# Altium PCB PCB1.PcbDoc
Units mil, origin at the board's own origin, x right, y up, seen from the top; angles counter-clockwise.
Board outline 3937 x 1968.5 mil, 2 copper layers (Top Layer, Bottom Layer); 57 components, 43 nets, 144 pads, 0 vias.
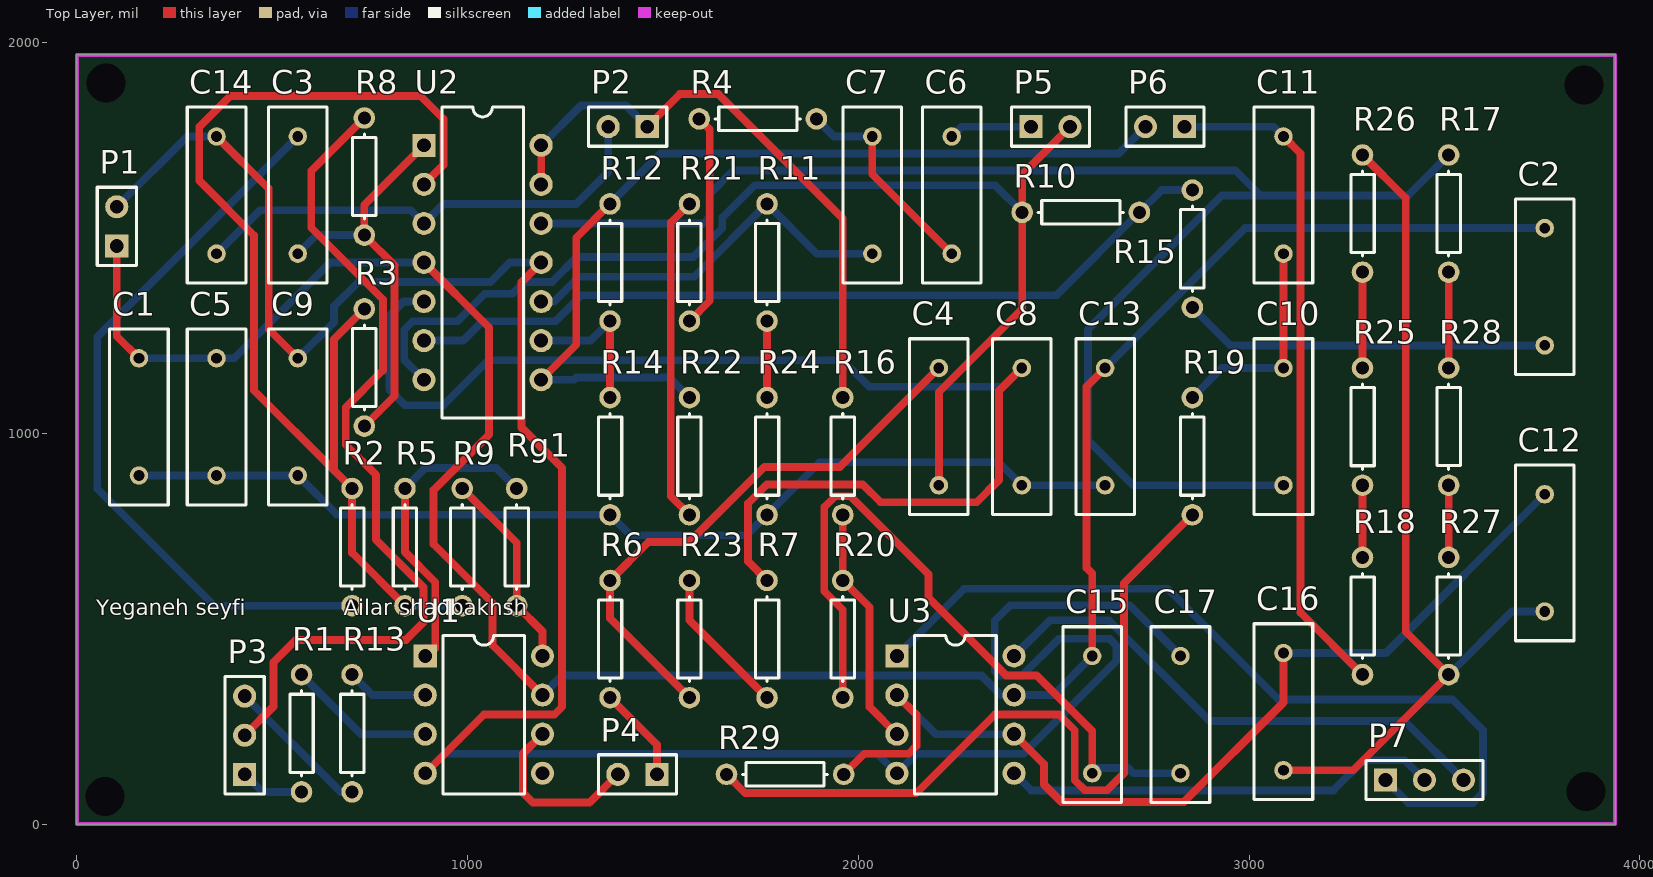
[diagram p0: Top Layer view]
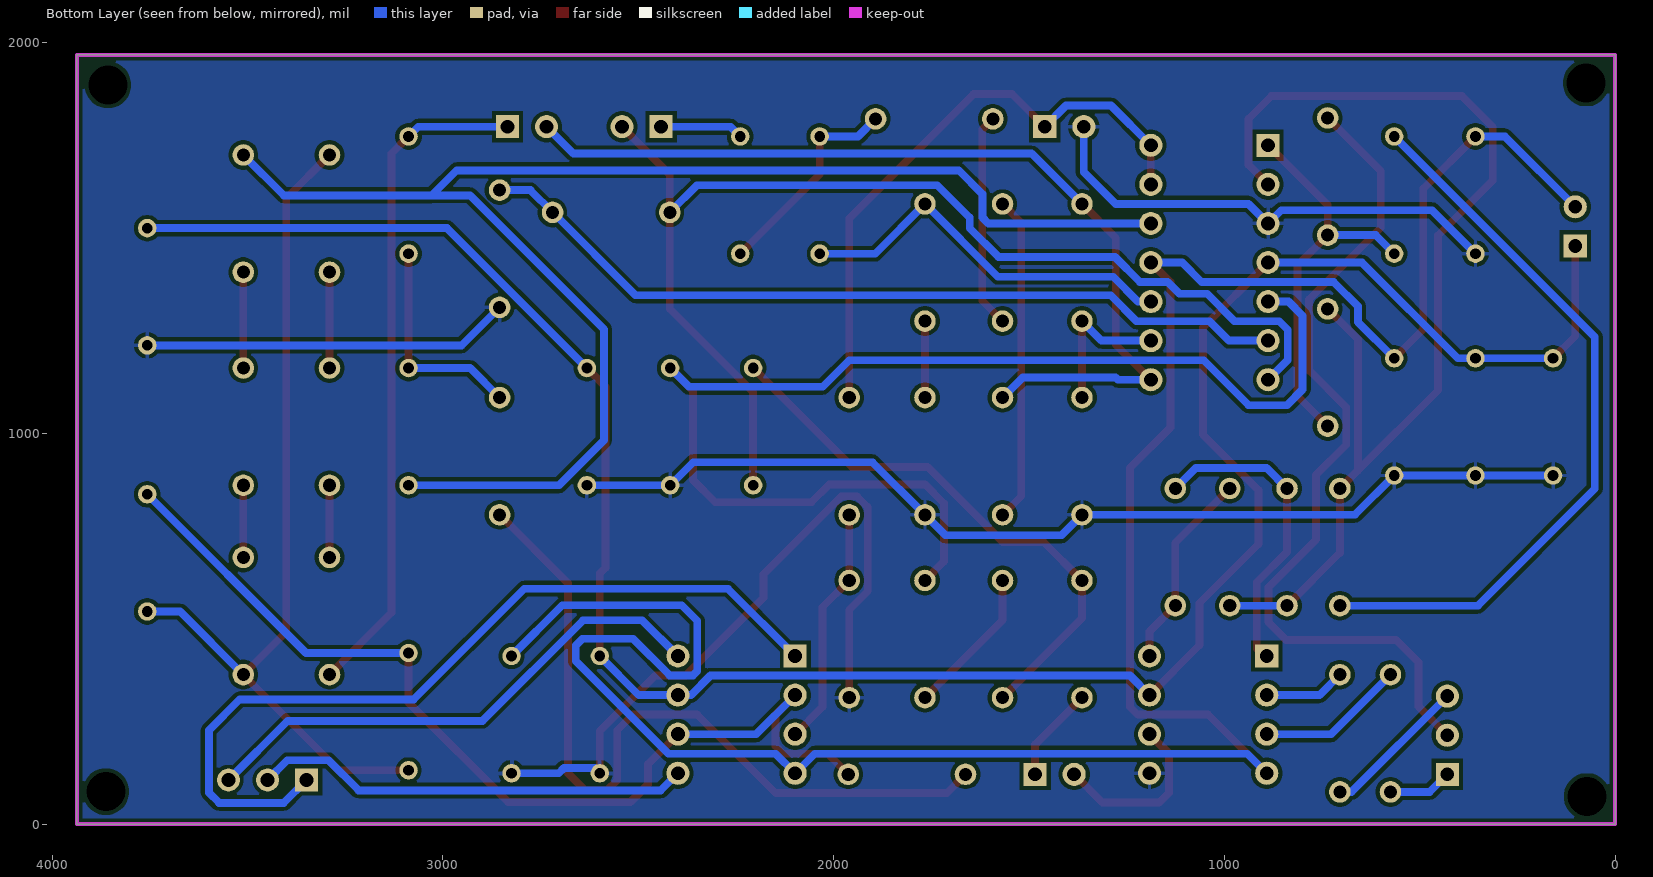
[diagram p1: Bottom Layer view, seen from below]

## Layer stack, top to bottom
Top Solder: solder mask 0.4, Solder Resist, Dk 3.5
Top Layer: signal copper 1.4
Dielectric 1: dielectric 12.6, FR-4, Dk 4.8
Bottom Layer: signal copper 1.4
Bottom Solder: solder mask 0.4, Solder Resist, Dk 3.5

## Board outline
0,0 3937,0 3937,1968.5 0,1968.5

## Design rules (kind name [scope] priority, off if disabled: settings)
BoardOutlineClearance [All] p1: gap=10 ignorepadtopadclearanceinfootprint=FALSE except(0: Arc-SplitContinuation Track-SplitContinuation SMDPad-SplitContinuation THPad-SplitContinuation Via-SplitContinuation Fill-SplitContinuation Poly-SplitContinuation Region-SplitContinuation Text-SplitContinuation)
Clearance [All] p1: gap=10 ignorepadtopadclearanceinfootprint=FALSE except(0: Arc-Hole Track-Hole SMDPad-Hole THPad-Hole Via-Hole Fill-Hole Poly-Hole Region-Hole Text-Hole)
PolygonConnect [All] p1: connectstyle=Relief reliefconductorwidth=10 reliefentries=4 polygonreliefangle="90 Angle" airgapwidth=10
RoutingVias [All] p1: holewidth=28 width=50 viastyle="Through Hole" minholewidth=28 minwidth=50 maxholewidth=28 maxwidth=50
SolderMaskExpansion [All] p1: expansion=4 istentingtop=FALSE
Width [All] p1: maxlimit=100 minlimit=10 preferedwidth=20
30 further rules are at their usual default settings.

## Components (designator, comment, footprint, x,y, rotation, side; value= is the part's Value field where it differs from the comment)
C1 "100nF" RAD-0.3 158.85,1041.96 r90 top
C2 "10uF" RAD-0.3 3756.96,1375.06 r90 top
C3 "100nF" RAD-0.3 565.47,1609.75 r90 top
C4 "Cap" RAD-0.3 2206.13,1017.02 r90 top value=10nF
C5 "Cap" RAD-0.3 357.43,1041.96 r90 top value=100nF
C6 "Cap" RAD-0.3 2239.23,1609.75 r90 top value=10u
C7 "Cap" RAD-0.3 2035.92,1609.75 r90 top value=10u
C8 "Cap" RAD-0.3 2418.54,1017.02 r90 top value=100nF
C9 "Cap" RAD-0.3 565.47,1041.96 r90 top value=100nF
C10 "Cap" RAD-0.3 3088.07,1017.02 r90 top value=10nF
C11 "Cap" RAD-0.3 3088.07,1609.75 r90 top value=10nF
C12 "Cap" RAD-0.3 3756.96,693.94 r90 top value=10nF
C13 "100nF" RAD-0.3 2631.67,1017.02 r90 top
C14 "Cap" RAD-0.3 357.43,1609.75 r90 top value=100nF
C15 "Cap" RAD-0.3 2598.57,279.94 r90 top value=100nF
C16 "Cap" RAD-0.3 3088.07,287.62 r90 top value=10nF
C17 "Cap" RAD-0.3 2824.51,279.94 r90 top value=100nF
P1 "Header 2" HDR1X2 102.11,1479.67 r90 top
P2 "Header 2" HDR1X2 1459.8,1784.75 r180 top
P3 "Header 3" HDR1X3 429.47,127.18 r90 top
P4 "Header 2" HDR1X2 1484.53,127.18 r180 top
P5 "Header 2" HDR1X2 2441.83,1784.75 r0 top
P6 "Header 2" HDR1X2 2834.98,1784.75 r180 top
P7 "Header 3" HDR1X3 3348.92,112.62 r0 top
R1 "Res1" AXIAL-0.3 574.93,232.15 r90 top value=220k
R2 "Res1" AXIAL-0.3 704.47,708.75 r90 top value=10k
R3 "Res1" AXIAL-0.3 735.68,1168.32 r90 top value=1meg
R4 "Res1" AXIAL-0.3 1742.78,1804.75 r180 top value=560k
R5 "Res1" AXIAL-0.3 839.7,708.75 r90 top value=22k
R6 "Res1" AXIAL-0.3 1364.53,473.29 r90 top value=82K
R7 "Res1" AXIAL-0.3 1766.42,473.29 r90 top value=8.2k
R8 "Res1" AXIAL-0.3 735.68,1657.13 r90 top value=220k
R9 "Res1" AXIAL-0.3 986.28,708.75 r90 top value=22k
R10 "Res1" AXIAL-0.3 2569.45,1565.5 r180 top value=100k
R11 "Res1" AXIAL-0.3 1766.42,1437.11 r90 top value=33k
R12 "Res1" AXIAL-0.3 1364.53,1437.11 r90 top value=100k
R13 "Res1" AXIAL-0.3 704.47,232.15 r90 top value=220k
R14 "Res1" AXIAL-0.3 1364.53,941.37 r90 top value=10k
R15 "Res1" AXIAL-0.3 2854.98,1472.33 r90 top value=10k
R16 "Res1" AXIAL-0.3 1960.27,941.37 r90 top value=100
R17 "Res1" AXIAL-0.3 3511.1,1562.37 r90 top value=18K
R18 "Res1" AXIAL-0.3 3290.48,532.3 r90 top value=150K
R19 "Res1" AXIAL-0.3 2854.98,941.37 r90 top value=39k
R20 "Res1" AXIAL-0.3 1960.27,473.29 r90 top value=1k
R21 "Res1" AXIAL-0.3 1567.84,1437.11 r90 top value=39k
R22 "Res1" AXIAL-0.3 1567.84,941.37 r90 top value=1k
R23 "Res1" AXIAL-0.3 1567.84,473.29 r90 top value=10k
R24 "Res1" AXIAL-0.3 1766.42,941.37 r90 top value=56k
R25 "Res1" AXIAL-0.3 3290.48,1017.02 r90 top value=150K
R26 "Res1" AXIAL-0.3 3290.48,1562.37 r90 top value=18K
R27 "Res1" AXIAL-0.3 3511.1,532.31 r90 top value=150K
R28 "Res1" AXIAL-0.3 3511.1,1017.02 r90 top value=150K
R29 "Res1" AXIAL-0.3 1812.65,127.18 r180 top value=120k
Rg1 "Res1" AXIAL-0.3 1125.57,708.75 r90 top value=15k
U1 "AD620AN" N-8 1041.66,279.94 r270 top
U2 "TL084J" J014 1038.29,1437.11 r270 top
U3 "TL081JG" JG008 2248.69,279.94 r270 top

## Footprints (in the part's own frame and the unit in brackets; to place one, negate y for a bottom-side part, rotate by r counter-clockwise, add the part's x,y. Pads: shape width x height; smd on the part's side, far side on the other; paste and mask are expansions set on the pad)
AXIAL-0.3 [mm] "Axial Device, Thru-Hole; 2 Leads; 0.3 in Pin Spacing"
  round 1.4 hole 0.85: 1(-3.81,0) 2(3.81,0)
  silkscreen extent -2.77,-0.76 2.77,0.76
HDR1X2 [mm] "Connector; Header; 2 Position"
  rect 1.5x1.5 hole 0.9: 1(0,0)
  round 1.5 hole 0.9: 2(2.54,0)
  silkscreen extent -1.27,-1.27 3.81,1.27
HDR1X3 [mm] "Connector; Header; 3 Position"
  rect 1.5x1.5 hole 0.9: 1(0,0)
  round 1.5 hole 0.9: 2(2.54,0) 3(5.08,0)
  silkscreen extent -1.27,-1.27 6.35,1.27
J014 [mm] "DIP; 14 Leads; Row Spacing 7.62 mm; Pitch 2.54 mm"
  rect 1.5x1.5 hole 0.9: 1(-7.62,-3.81)
  round 1.5 hole 0.9: 2(-5.08,-3.81) 3(-2.54,-3.81) 4(0,-3.81) 5(2.54,-3.81) 6(5.08,-3.81) 7(7.62,-3.81) 8(7.62,3.81) 9(5.08,3.81) 10(2.54,3.81) 11(0,3.81) 12(-2.54,3.81) 13(-5.08,3.81) 14(-7.62,3.81)
  silkscreen extent -10.1,-2.65 10.1,2.65
JG008 [mm] "DIP; 8 Leads; Row Spacing 7.62 mm; Pitch 2.54 mm"
  rect 1.5x1.5 hole 0.9: 1(-3.81,-3.81)
  round 1.5 hole 0.9: 2(-1.27,-3.81) 3(1.27,-3.81) 4(3.81,-3.81) 5(3.81,3.81) 6(1.27,3.81) 7(-1.27,3.81) 8(-3.81,3.81)
  silkscreen extent -5.15,-2.65 5.15,2.65
N-8 [mm] "DIP; 8 Leads; Row Spacing 7.62 mm; Pitch 2.54 mm"
  rect 1.5x1.5 hole 0.9: 1(-3.81,-3.81)
  round 1.5 hole 0.9: 2(-1.27,-3.81) 3(1.27,-3.81) 4(3.81,-3.81) 5(3.81,3.81) 6(1.27,3.81) 7(-1.27,3.81) 8(-3.81,3.81)
  silkscreen extent -5.15,-2.65 5.15,2.65
RAD-0.3 [mm] "Radial Cap, Thru-Hole; 2 Leads; 0.3 in Pin Spacing"
  round 1.2 hole 0.7: 1(-3.81,0) 2(3.81,0)
  silkscreen extent -5.72,-1.9 5.71,1.91

## Part data
C1 C2 C3 C13: library part Cap, "Capacitor", LatestRevisionDate=17-Jul-2002, LatestRevisionNote="Re-released for DXP Platform.", PackageDescription="Radial Cap, Thru-Hole; 2 Leads; 0.3 in Pin Spacing", PackageReference=RAD-0.3, Published=8-Jun-2000, Publisher="Altium Limited"
C4 C5 C6 C7 C8 C9 C10 C11 C12 C14 C15 C16 C17: "Capacitor", LatestRevisionDate=17-Jul-2002, LatestRevisionNote="Re-released for DXP Platform.", PackageDescription="Radial Cap, Thru-Hole; 2 Leads; 0.3 in Pin Spacing", PackageReference=RAD-0.3, Published=8-Jun-2000, Publisher="Altium Limited"
P1 P2 P4 P5 P6: "Header, 2-Pin", LatestRevisionDate=17-Jul-2002, LatestRevisionNote="Re-released for DXP Platform.", Publisher="Altium Limited"
P3 P7: "Header, 3-Pin", LatestRevisionDate=17-Jul-2002, LatestRevisionNote="Re-released for DXP Platform.", Publisher="Altium Limited"
R1 R2 R3 R4 R5 R6 R7 R8 R9 R10 R11 R12 R13 R14 R15 R16 R17 R18 R19 R20 R21 R22 R23 R24 R25 R26 R27 R28 R29 Rg1: "Resistor", LatestRevisionDate=17-Jul-2002, LatestRevisionNote="Re-released for DXP Platform.", PackageDescription="Axial Device, Thru-Hole; 2 Leads; 0.3 in Pin Spacing", PackageReference=AXIAL-0.3, Published=8-Jun-2000, Publisher="Altium Limited"
U1: "Low-Cost, Low-Power Instrumentation Amplifier", ComponentLink1Description="Manufacturer Link", ComponentLink1URL=http://www.analog.com/en/prod/0%2C2877%2CAD620%2C00.html, ComponentLink2Description=Datasheet, ComponentLink2URL=http://www.analog.com/UploadedFiles/Data_Sheets/897653854AD620_g.pdf, DatasheetVersion="REV.D 1998", LatestRevisionDate=04-Mar-2005, LatestRevisionNote="Stylized 3D Model Added.", PackageDescription="DIP; 8 Leads; Row Spacing 7.62 mm; Pitch 2.54 mm", PackageReference=N-8, PackageVersion=revA, Published=8-Jun-2000, Publisher="Altium Limited"
U2 U3: "JFET-Input Operational Amplifier", ComponentLink1Description="Manufacturer Link", ComponentLink1URL=http://www.ti.com/, ComponentLink2Description=Datasheet, DatasheetVersion=Feb-1999, LatestRevisionDate=04-Mar-2005, LatestRevisionNote="Stylized 3D Model Added.", Published=16-Jan-2001, Publisher="Altium Limited"
  U2: ComponentLink2URL=http://www-s.ti.com/sc/ds/tl084.pdf, PackageDescription="DIP; 14 Leads; Row Spacing 7.62 mm; Pitch 2.54 mm", PackageReference=J014, PackageVersion=Jun-1999
  U3: ComponentLink2URL=http://www-s.ti.com/sc/ds/tl081.pdf, Note="Pin 8 is not connected", PackageDescription="DIP; 8 Leads; Row Spacing 7.62 mm; Pitch 2.54 mm", PackageReference=JG008, PackageVersion=Jan-1995

## Free pads (board coordinates)
  round 60 hole 100: 1(71.91,70.44) 1(74.07,1896.59) 1(3857.57,1891.58) 1(3862.97,82.79)

## Nets (pads, with @x,y where several pads share a name; then routed paths per layer and width w, separated by ;. In a path a pad name is that pad's centre, name@x,y a point inside that pad or via, vN(x,y) a via of type N, cw(c..) or ccw(c..) an arc to the next point about the centre after c; other vN are vias at no path point)
GND: C1.1 C2.1 C5.1 C8.1 C9.1 C13.1 C14.1 C15.1 C17.1 P2.2 R14.1 R15.1 R20.1 R24.1 U1.5 U2.3 | length 6647.5
  Top Layer w20: R20.1 1960.27,548.15 1912.71,595.71 1912.71,811.07 1940.57,838.93 1979.97,838.93 2179.54,639.36 2179.54,579.04 2378.17,380.41 2456.02,380.41 2598.57,237.86 C15.1
  Bottom Layer w20: C1.1 C5.1 C9.1 666.06,791.37 R14.1 1416.9,739 1714.04,739 R24.1 1901.04,926 2359.56,926 C8.1 C13.1 ; C14.1 468.69,1571 854.4,1571 U2.3 938.18,1587 1278,1587 1359.8,1668.8 P2.2 ; C15.1 2612.04,143.41 2690.28,143.41 2703.76,129.94 C17.1 ; R15.1 2952.25,1225.06 C2.1
IN+: R1.2 U1.3 | length 379.8
  Bottom Layer w20: R1.2 727.14,229.94 U1.3
IN-: R13.2 U1.2 | length 208.8
  Bottom Layer w20: R13.2 756.68,329.94 U1.2
LA: P3.1 R1.1 | length 164.1
  Bottom Layer w20: P3.1 474.5,82.15 R1.1
NC: P7.3 U3.8 | length 1357.7
  Bottom Layer w20: U3.8 2490.44,521.69 2641.31,521.69 2899,264 3397.54,264 P7.3
NetC3_1: C3.1 R3.1 R8.1 U2.1 | length 1036.1
  Top Layer w20: R3.1 813.25,1095.88 813.25,1429.57 R8.1 735.69,1584.51 U2.1
  Bottom Layer w20: C3.1 612.85,1507.13 R8.1
NetC3_2: C3.2 R2.1 | length 1890.9
  Bottom Layer w20: C3.2 52,1246.28 52,858 351.25,558.75 R2.1
NetC4_1: C4.1 P5.2 R10.2 U2.7 | length 2984.7
  Top Layer w20: C4.1 2206.14,1105.14 2419.45,1318.45 R10.2 2419.45,1662.37 P5.2
  Bottom Layer w20: U2.7 838,1187.4 838,1265 860,1287 974,1287 1044,1357 1115,1357 1145.58,1387.58 1216.58,1387.58 1280,1451 1577.89,1451 1652,1525.11 1652,1551.91 1735.09,1635 2349.96,1635 R10.2
NetC4_2: C4.2 R6.2 R23.1 | length 1451
  Top Layer w20: R23.1 1364.53,526.6 R6.2 1463.24,722 1568,722 1760,914 1953.11,914 C4.2
NetC6_1: C6.1 C7.2 R4.1 | length 546
  Top Layer w20: C7.2 2035.92,1663.06 C6.1
  Bottom Layer w20: R4.1 1937.78,1759.75 C7.2
NetC6_2: C6.2 P5.1 | length 213
  Bottom Layer w20: C6.2 2264.23,1784.75 P5.1
NetC7_1: C7.1 R11.2 U2.10 | length 1003.9
  Bottom Layer w20: U2.10 1221.47,1337.11 1284.78,1400.42 1579.73,1400.42 R11.2 1893.78,1459.75 C7.1
NetC8_2: C8.2 R7.2 U2.5 | length 3255.9
  Top Layer w20: R7.2 1718,671.71 1718,821 1765.93,868.93 2011.58,868.93 2057.11,823.4 2302.76,823.4 2360,880.65 2360,1108.49 C8.2
  Bottom Layer w20: U2.5 836.11,1337.11 800,1301 800,1112 840,1072 938,1072 1053,1187 1960,1187 2028,1119 2370.51,1119 C8.2
NetC10_1: C10.1 R17.2 U2.12 | length 3898.3
  Bottom Layer w20: U2.12 1604.11,1537.11 1619.16,1552.16 1619.16,1612.16 1680,1673 2965,1673 3029,1609 ; C10.1 2702.98,867.02 2588,982 2588,1266 2931,1609 3029,1609 ; R17.2 3407.73,1609 3029,1609
NetC10_2: C10.2 C11.1 R19.2 | length 557.2
  Top Layer w20: C10.2 C11.1
  Bottom Layer w20: R19.2 2930.63,1167.02 C10.2
NetC11_2: C11.2 P6.1 R18.1 | length 1724.7
  Top Layer w20: C11.2 3132,1715.81 3132,540.78 R18.1
  Bottom Layer w20: P6.1 3063.07,1784.75 C11.2
NetC12_1: C12.1 C16.1 R26.2 R27.1 | length 2258.6
  Top Layer w20: C16.1 3266.41,137.62 R27.1 3401,492.4 3401,1601.85 R26.2
  Bottom Layer w20: R27.1 3672.73,543.94 C12.1
NetC12_2: C12.2 C16.2 R29.1 U3.2 U3.6 | length 2569.9
  Top Layer w20: R29.1 2015.47,180 2129,180 2149,200 2149,279.63 U3.2 ; U3.6 2475.39,153.23 2475.39,100.92 2520,56.32 2833.32,56.32 3088.07,311.07 C16.2
  Bottom Layer w20: U3.2 2198.69,229.94 U3.6 ; C16.2 3350.64,437.62 C12.2
NetP4_1: P4.1 R6.1 | length 245.8
  Top Layer w20: R6.1 1484.53,203.29 P4.1
NetP4_2: P4.2 U1.6 | length 453.3
  Top Layer w20: U1.6 1142,180.28 1142,80 1167,55 1312.35,55 P4.2
NetR2_2: R2.2 R3.2 R5.1 R9.1 U2.2 | length 2905.6
  Top Layer w20: R3.2 658.13,1240.76 658.13,905.09 ; R5.1 704.47,693.98 R2.2 658.13,905.09 ; U2.2 938,1686.82 938,1805 880,1863 392,1863 313,1784 313,1647 453,1507 453,1110.21 658.13,905.09
  Bottom Layer w20: R5.1 R9.1
NetR4_2: R4.2 R21.1 | length 550.5
  Top Layer w20: R21.1 1620,1339.27 1620,1777.53 R4.2
NetR7_1: R7.1 R23.2 | length 382.3
  Top Layer w20: R23.2 1567.84,521.87 R7.1
NetR10_1: R10.1 R15.2 U2.6 | length 2126.3
  Bottom Layer w20: U2.6 988.11,1237.11 1038,1287 1225,1287 1291.09,1353.09 2507.04,1353.09 R10.1 2776.28,1622.33 R15.2
NetR11_1: R11.1 R24.2 | length 195.7
  Top Layer w20: R24.2 R11.1
NetR12_1: R12.1 R14.2 U2.9 | length 392.7
  Top Layer w20: R14.2 R12.1
  Bottom Layer w20: U2.9 1314.53,1237.11 R12.1
NetR16_1: R16.1 R20.2 U3.3 | length 618.8
  Top Layer w20: R16.1 R20.2 2029,554.56 2029,299.63 U3.3
NetR17_1: R17.1 R28.2 | length 245.3
  Top Layer w20: R28.2 R17.1
NetR18_2: R18.2 R25.1 | length 184.7
  Top Layer w20: R18.2 R25.1
NetR19_1: R19.1 R29.2 | length 2027.5
  Top Layer w20: R29.2 1710.83,79 2148,79 2349,280 2514,280 2554,240 2554,112.32 2580,86.32 2636.32,86.32 2680,130 2680,616.4 R19.1
NetR21_2: R21.2 R22.1 | length 835.4
  Top Layer w20: R22.1 1520,839.21 1520,1539.27 R21.2
NetR25_2: R25.2 R26.1 | length 245.3
  Top Layer w20: R25.2 R26.1
NetR27_2: R27.2 R28.1 | length 184.7
  Top Layer w20: R27.2 R28.1
OS1: P7.1 U3.1 | length 2166.7
  Bottom Layer w20: U3.1 2270.75,602 2792,602 3075,319 3520,319 3599,240 3599,80 3573,54 3407.54,54 P7.1
OS2: P7.2 U3.5 | length 1121.2
  Bottom Layer w20: U3.5 2442.63,86 3216,86 3293,163 3398.54,163 P7.2
RA: P3.3 R13.1 | length 376.5
  Bottom Layer w20: P3.3 674.5,82.15 R13.1
Rg1: R5.2 Rg1.2 U1.1 | length 815.7
  Top Layer w20: R5.2 839.7,696.31 917.26,618.75 917.26,449.47 891.66,449.47 U1.1
  Bottom Layer w20: R5.2 891.96,911 1073.32,911 Rg1.2
Rg2: R9.2 Rg1.1 U1.8 | length 513.9
  Top Layer w20: R9.2 1125.57,719.45 Rg1.1 1191.66,492.66 U1.8
RL: P3.2 R8.2 | length 2188.8
  Top Layer w20: P3.2 503,300.71 503,414 560,471 842,471 887.26,516.26 887.26,606 765.37,727.89 765.37,893.52 688.13,970.76 688.13,1065.88 783.25,1161 783.25,1342.75 600,1526 600,1671.44 R8.2
VCC: C1.2 C2.2 C5.2 C13.2 C15.2 P1.1 U1.7 U2.4 U3.7 | length 6018.9
  Top Layer w20: P1.1 102.11,1248.7 C1.2 ; U2.4 1055,1270.4 1055,997 913,855 913,716 1064,565 1064,457.6 U1.7 ; C15.2 2598.57,641 2584,655.57 2584,1119.36 C13.2
  Bottom Layer w20: C1.2 C5.2 402.96,1191.96 648.11,1437.11 U2.4 ; U1.7 1241.72,380 2315.16,380 2365.22,329.94 U3.7 2498.57,329.94 C15.2 ; C13.2 2989.71,1525.06 C2.2
VEE: C9.2 C14.2 C17.2 P1.2 U1.4 U2.11 U3.4 | length 6358.4
  Top Layer w20: C14.2 491,1626.18 491,1266.44 C9.2 ; U1.4 1041.72,280 1222,280 1242,300 1242,911 1138,1015 1138,1386.82 U2.11
  Bottom Layer w20: P1.2 282.19,1759.75 C14.2 ; C9.2 658.13,1284.62 658.13,1325.13 720,1387 1058,1387 1108.11,1437.11 U2.11 ; U1.4 941.72,180 2048.63,180 U3.4 2148.75,180 2423,180 2660,417 2660,457 2643,474 2513.59,474 2420,380.41 2360,380.41 2349,391.41 2349,520 2389,560 2694.45,560 C17.2
Vo3: P6.2 R12.2 R22.2 U2.8 | length 2378.7
  Top Layer w20: U2.8 1278,1226.82 1278,1500.58 R12.2
  Bottom Layer w20: U2.8 1273,1137.11 1278.89,1143 1516.21,1143 R22.2 ; R12.2 1493.42,1716 2666.23,1716 P6.2
Vout: P2.1 R16.2 U2.13 U2.14 | length 1561.3
  Top Layer w20: U2.13 U2.14 ; P2.1 1543.05,1868 1642,1868 1960.27,1549.73 R16.2
  Bottom Layer w20: U2.14 1290.18,1839 1405.55,1839 P2.1

## Polygon pours and split planes (outlines as drawn)
GND on Bottom Layer "Bottom Ground" (solid, pour order 2): 0.06,1967.01 3933.06,1967.01 3936.52,1970.47 3936.52,-1.22 -3.4,-1.22

## Keep-outs
Keep-Out Layer:
  the board outline again, w10

## Silkscreen, mask and mechanical layers (free items; w line width, h text height)
Top Overlay:
  text "Yeganeh seyfi              Ailar shadbakhsh" at 50.11,534.75 h40